# Altium PCB CAN_Breakout-Board.PcbDoc
Units mm, origin at the board's own origin, x right, y up, seen from the top; angles counter-clockwise.
Board outline 50.8 x 25.4 mm, 2 copper layers (Top Layer, Bottom Layer); 47 components, 28 nets, 171 pads, 21 vias.
Unrouted connection lines stored in the file: 31.
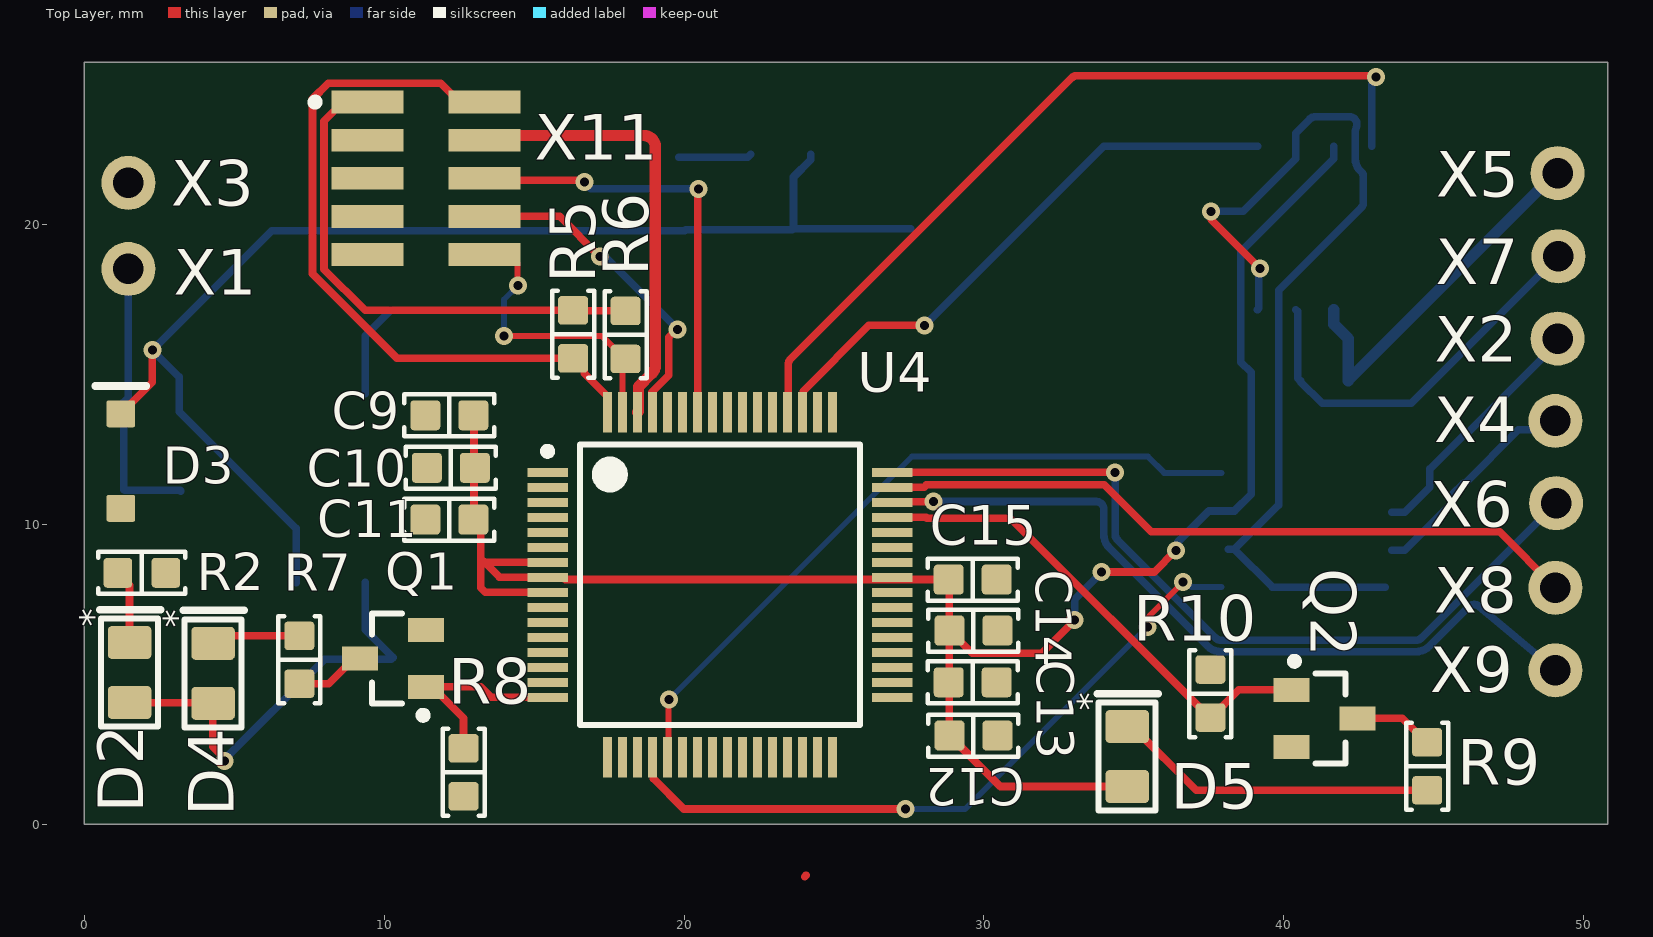
[diagram p0: Top Layer view]
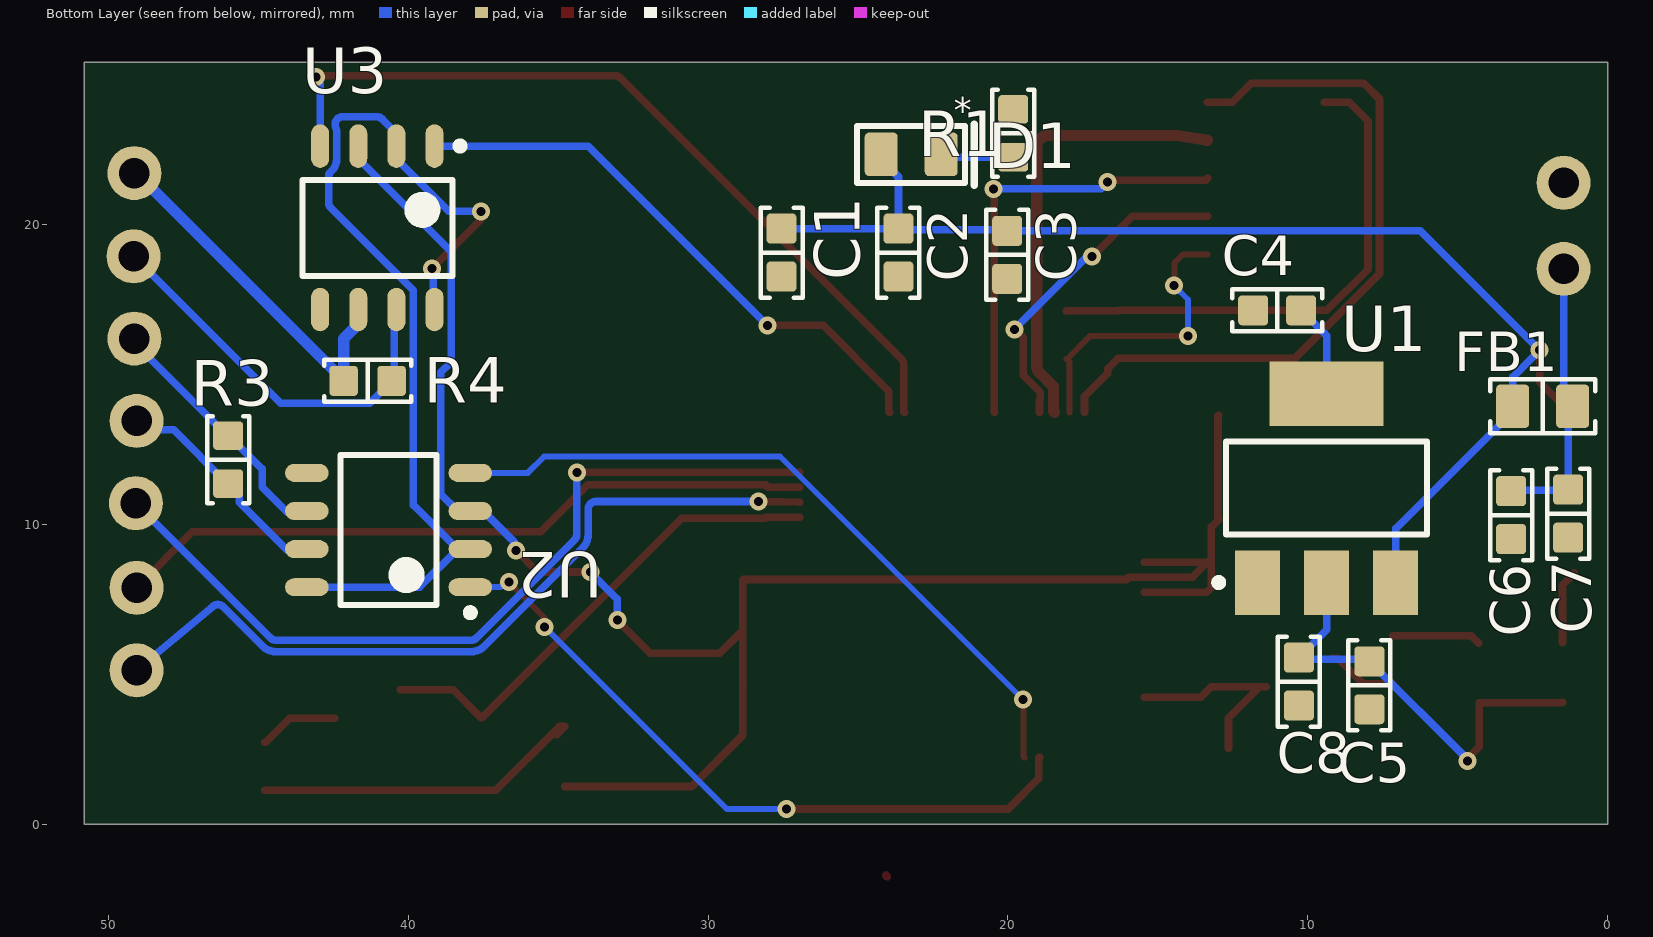
[diagram p1: Bottom Layer view, seen from below]
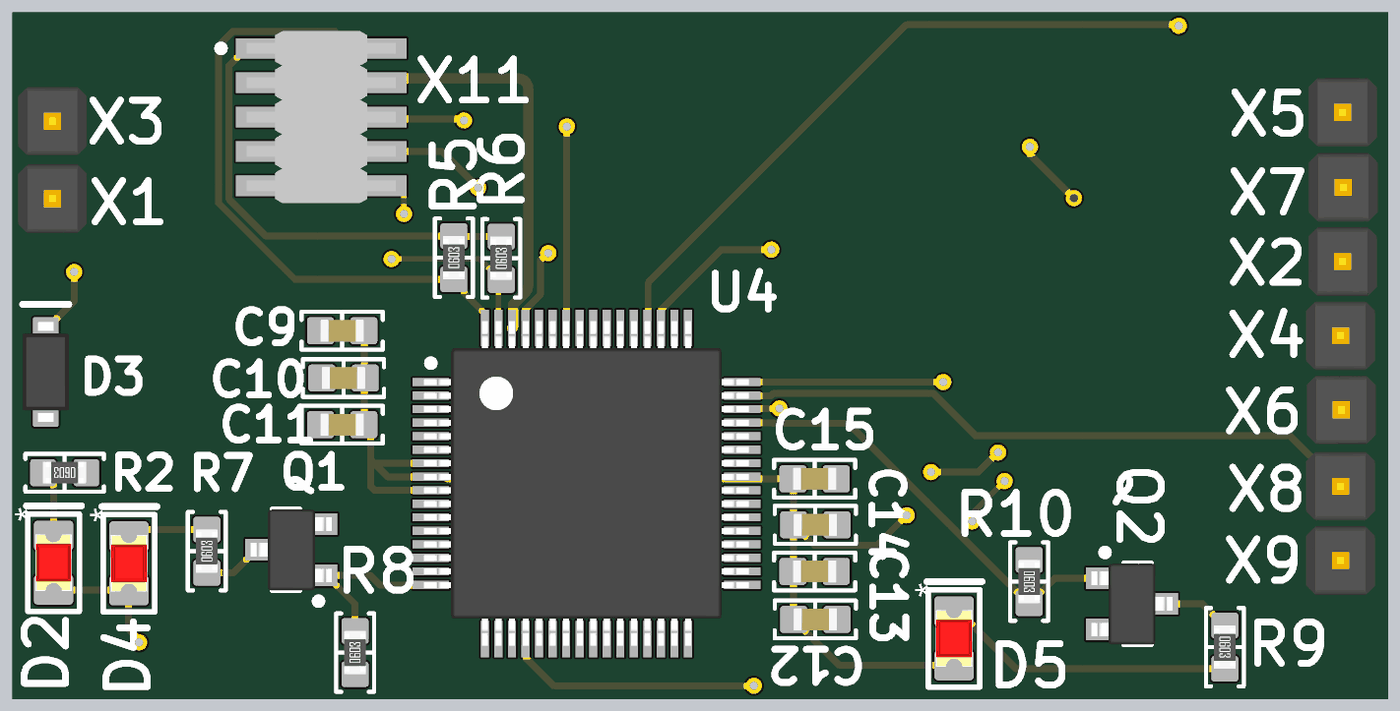
[diagram p2: 3D render of the assembled board from above, using the file's embedded part models]
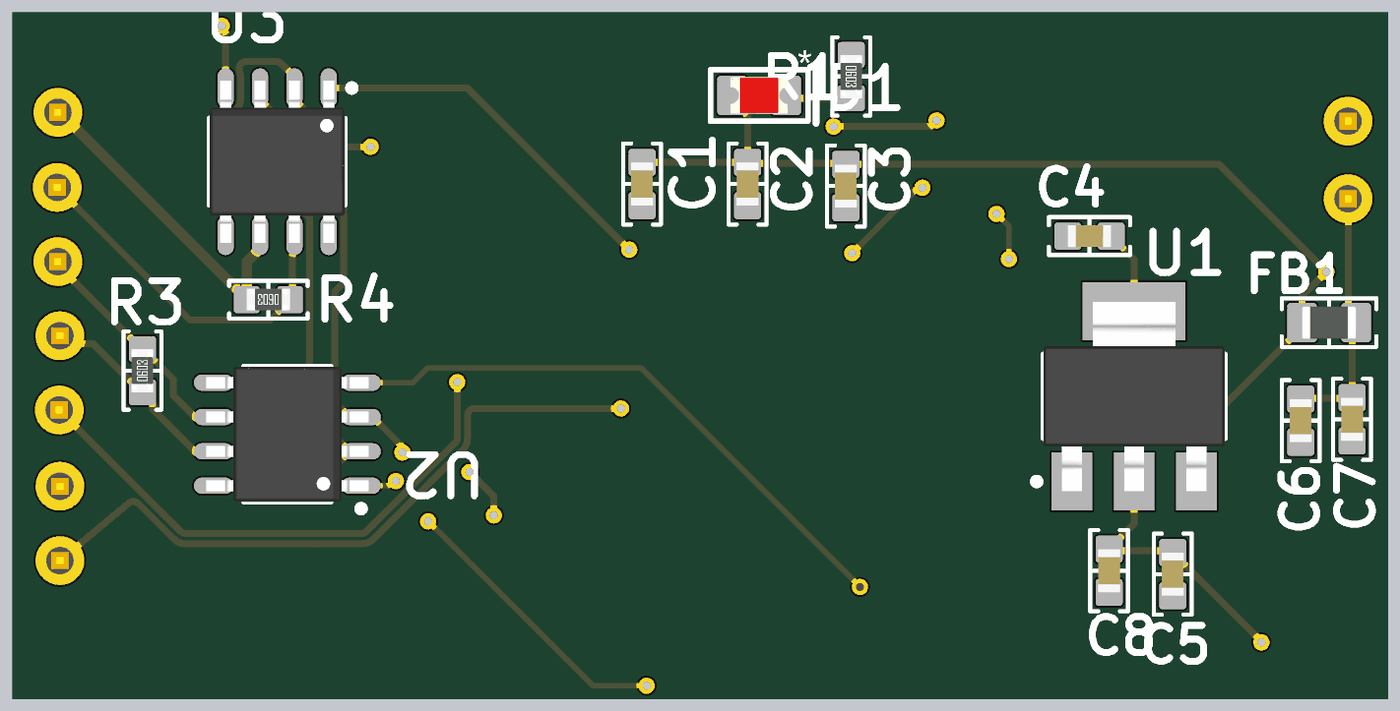
[diagram p3: 3D render of the assembled board from below, using the file's embedded part models]

## Layer stack, top to bottom
Top Solder: solder mask 0.0102, Solder Resist, Dk 3.5
Top Layer: signal copper 0.0356
Dielectric 1: dielectric 0.32, FR-4, Dk 4.8
Bottom Layer: signal copper 0.0356
Bottom Solder: solder mask 0.0102, Solder Resist, Dk 3.5

## Board outline
0,0 50.8,0 50.8,25.4 0,25.4

## Design rules (kind name [scope] priority, off if disabled: settings)
BoardOutlineClearance [All] p1: gap=0.2 ignorepadtopadclearanceinfootprint=FALSE
Clearance [All] p1: gap=0.127 ignorepadtopadclearanceinfootprint=FALSE except(0.25: Arc-Hole Track-Hole SMDPad-Hole THPad-Hole Via-Hole Fill-Hole Poly-Hole Region-Hole Text-Hole)
ComponentClearance [All] p1: gap=0.127 collisioncheckmode=3 verticalgap=0.127 showdistances=TRUE
DiffPairsRouting [All] p1: maxlimit=0.254 minlimit=0.127 mostfreqgap=0.127 toplayer_minwidth=0.127 toplayer_maxwidth=25.4 toplayer_prefwidth=0.127 bottomlayer_minwidth=0.127 bottomlayer_maxwidth=25.4 bottomlayer_prefwidth=0.127 maxuncoupledlength=12.7
Height [All] p1: minheight=0 maxheight=1816.048 prefheight=12.7
HoleSize [All] p1: absolutevalues=TRUE maxlimit=6.3 minlimit=0.3 maxpercent=80.000 minpercent=20.000
HoleToHoleClearance [All] p1: gap=0.25 allowstackedmicrovias=FALSE
MinimumAnnularRing [All] p1: minimumring=0.076
MinimumSolderMaskSliver [All] p1: minsoldermaskwidth=0
PlaneClearance [All] p1: clearance=0.127
PlaneConnect PlaneConnectPowerPads [InPadClass('PowerPads')] p1: planeconnectstyle=Direct reliefexpansion=0.508 reliefentries=4 reliefconductorwidth=0.254 reliefairgap=0.254
PlaneConnect [All] p2: pad.planeconnectstyle=Relief pad.reliefexpansion=0.3 pad.reliefentries=4 pad.reliefconductorwidth=0.127 pad.reliefairgap=0.127 via.planeconnectstyle=Direct via.reliefexpansion=0.3 via.reliefentries=4 via.reliefconductorwidth=0.127 via.reliefairgap=0.127
PolygonConnect PolygonConnectPowerPads [All vs (InPadClass('PowerPads'))] p1: connectstyle=Direct reliefconductorwidth=0.254 reliefentries=4 polygonreliefangle="90 Angle" airgapwidth=0.254
PolygonConnect [All] p2: thpad.connectstyle=Relief thpad.reliefconductorwidth=0.127 thpad.reliefentries=4 thpad.polygonreliefangle="90 Angle" thpad.airgapwidth=0.127 smdpad.connectstyle=Relief smdpad.reliefconductorwidth=0.127 smdpad.reliefentries=4 smdpad.polygonreliefangle="90 Angle" smdpad.airgapwidth=0.127 via.connectstyle=Direct via.reliefconductorwidth=0.127 via.reliefentries=4 via.polygonreliefangle="90 Angle" via.airgapwidth=0.127
RoutingVias [All] p1: holewidth=0.3 width=0.6 viastyle="Through Hole" minholewidth=0.3 minwidth=0.6 maxholewidth=0.6 maxwidth=6.6
SilkToSilkClearance [All] p1: silktosilkclearance=0
SilkToSolderMaskClearance [IsPad] p1: minsilkscreentomaskgap=0.127 clearancetoexposedcopper=TRUE
SolderMaskExpansion [All] p1: expansion=0.075 istentingtop=FALSE
Width [All] p1: maxlimit=25.4 minlimit=0.127 preferedwidth=0.127 minimp=50.000000 maximp=50.000000 favimp=50.000000
20 further rules are at their usual default settings.

## Classes and differential pairs
channel class can: U_can_0 U_can_1
component class U_uc: C10 C11 C12 C13 C14 C15 D4 D5 Q1 Q2 R5 R6 R7 R8 R9 R10 U4 X11
component class U_can_1: C9 R4 U3
component class U_can_0: C8 R3 U2
component class U_5V_Regulator: C1 C2 C3 C4 C5 C6 C7 D1 D2 D3 FB1 R1 R2 U1
component class Top_Level: X1 X2 X3 X4 X5 X6 X7 X8 X9
differential pair 1_CAN: +1_CAN_P -1_CAN_N
differential pair 0_CAN: +0_CAN_P -0_CAN_N

## Components (designator, comment, footprint, x,y, rotation, side; value= is the part's Value field where it differs from the comment)
C1 "Capacitor" 0603_CAP 27.55,19.05 r90 bottom value=1u
C2 "Capacitor" 0603_CAP 23.65,19.05 r90 bottom value=1u
C3 "Capacitor" 0603_CAP 20.025,18.975 r90 bottom value=10uF
C4 "Capacitor" 0603_CAP 11.025,17.125 r180 bottom value=10uF
C5 "Capacitor" 0603_CAP 7.95,4.625 r90 bottom value=1u
C6 "Capacitor" 0603_CAP 3.225,10.3 r90 bottom value=0.1u
C7 "Capacitor" 0603_CAP 1.325,10.35 r90 bottom value=0.1u
C8 "Capacitor" 0603_CAP 10.3,4.75 r270 bottom value=0.1u (schematic designator C14)
C9 "Capacitor" 0603_CAP 12.175,13.625 r180 top value=0.1u (schematic designator C14)
C10 "Capacitor" 0603_CAP 12.225,11.875 r0 top value=0.1u (schematic designator C8)
C11 "Capacitor" 0603_CAP 12.175,10.15 r0 top value=1u (schematic designator C9)
C12 "Capacitor" 0603_CAP 29.65,2.95 r180 top value=10n (schematic designator C10)
C13 "Capacitor" 0603_CAP 29.625,4.725 r180 top value=1u (schematic designator C11)
C14 "Capacitor" 0603_CAP 29.65,6.45 r180 top value=1u (schematic designator C12)
C15 "Capacitor" 0603_CAP 29.625,8.15 r180 top value=1u (schematic designator C13)
D1 "0805_LED" 0805_LED 23.225,22.325 r180 bottom (schematic designator D13)
D2 "0805_LED" 0805_LED 1.515,5.05 r90 top (schematic designator D14)
D3 "DDZ9701" SOD-123 1.225,12.1 r270 top (schematic designator D15)
D4 "0805_LED" 0805_LED 4.3,5.024 r90 top (schematic designator D16)
D5 "0805_LED" 0805_LED 34.775,2.25 r90 top (schematic designator D1)
FB1 "*" 0805_Ferrite 2.175,13.925 r0 bottom
Q1 "DMG2302UK-7" SOT23-3 10.3,5.525 r180 top
Q2 "DMG2302UK-7" SOT23-3 41.35,3.525 r0 top
R1 "Resistor" 0603_RES 19.825,23.025 r270 bottom value=2.2k (schematic designator R14)
R2 "Resistor" 0603_RES 1.925,8.375 r180 top value=470 (schematic designator R15)
R3 "Resistor" 0603_RES 46,12.15 r90 bottom value=120 (schematic designator R20)
R4 "Resistor" 0603_RES 41.35,14.775 r0 bottom value=120 (schematic designator R20)
R5 "Resistor" 0603_RES 16.3,16.325 r90 top value=10k (schematic designator R16)
R6 "Resistor" 0603_RES 18.05,16.302 r90 top value=10k (schematic designator R17)
R7 "Resistor" 0603_RES 7.175,5.475 r90 top value=470 (schematic designator R18)
R8 "Resistor" 0603_RES 12.65,1.723 r90 top value=100 (schematic designator R19)
R9 "Resistor" 0603_RES 44.775,1.925 r270 top value=470 (schematic designator R1)
R10 "Resistor" 0603_RES 37.55,4.35 r270 top value=100 (schematic designator R2)
U1 "NCP1117ST50T3G" SOT-233-4 9.375,11.2 r90 bottom
U2 "MCP2561/2FD" SOIC-8 40.65,9.8 r0 bottom (schematic designator U3)
U3 "MCP2561/2FD" SOIC-8 41.025,19.875 r270 bottom
U4 "MKE18F512VLH16" TQFP64 21.2,7.975 r0 top (schematic designator U2)
X1 "GenericPinHeader(0.1in)" GenericPinHeader(.1in) 1.475,18.505 r0 top
X2 "GenericPinHeader(0.1in)" GenericPinHeader(.1in) 49.125,16.182 r0 top
X3 "GenericPinHeader(0.1in)" GenericPinHeader(.1in) 1.475,21.375 r0 top
X4 "GenericPinHeader(0.1in)" GenericPinHeader(.1in) 49.05,13.438 r0 top
X5 "GenericPinHeader(0.1in)" GenericPinHeader(.1in) 49.125,21.7 r0 top
X6 "GenericPinHeader(0.1in)" GenericPinHeader(.1in) 49.075,10.695 r0 top
X7 "GenericPinHeader(0.1in)" GenericPinHeader(.1in) 49.15,18.925 r0 top
X8 "GenericPinHeader(0.1in)" GenericPinHeader(.1in) 49.05,7.875 r0 top
X9 "GenericPinHeader(0.1in)" GenericPinHeader(.1in) 49.05,5.125 r0 top
X11 "20021121-00010C4LF" HDR2X5_SMT 11.4,21.525 r270 top (schematic designator X15)

## Footprints (in the part's own frame and the unit in brackets; to place one, negate y for a bottom-side part, rotate by r counter-clockwise, add the part's x,y. Pads: shape width x height; smd on the part's side, far side on the other; paste and mask are expansions set on the pad)
0603_CAP [mm]
  rrect25% 1x1 smd: 1(-0.8,0) 2(0.8,0)
  silkscreen extent -1.5,-0.7 1.5,0.7, body extent -0.8,-0.41 0.8,0.41, height 0.82
0603_RES [mm] "Chip Resistor, 2-Leads, Body 1.60x0.80mm, IPC Medium Density"
  rrect25% 0.95x1 smd: 1(-0.8,0) 2(0.8,0)
  silkscreen extent -1.45,-0.7 1.45,0.7, body extent -0.8,-0.4 0.8,0.4, height 0.45
0805_Ferrite [mm]
  rrect25% 1.1x1.45 smd: 1(-1,0) 2(1,0)
  silkscreen extent -1.75,-0.9 1.75,0.9, body extent -1,-0.6 1,0.6, height 0.9
0805_LED [mm]
  rrect25% 1.1x1.45 smd: 1(-1,0) 2(1,0)
  silkscreen extent -1.8,-1.03 2.1,1, body extent -1.05,-0.67 1.05,0.67, height 0.9
GenericPinHeader(.1in) [mm] "Generic .1in (2.54mm) pin header"
  round 1.8 hole 1.016: 1(0,0)
  body extent -1.27,-1.27 1.27,1.27, height 9.5
HDR2X5_SMT [mm] "Header, 10-Leads, Body 3.43x6.35mm, Pitch 1.27mm"
  rect 0.76x2.4 smd: 1(-2.54,-1.95) 2(-2.54,1.95) 3(-1.27,-1.95) 4(-1.27,1.95) 5(0,-1.95) 6(0,1.95) 7(1.27,-1.95) 8(1.27,1.95) 9(2.54,-1.95) 10(2.54,1.95)
  silkscreen extent -2.66,-3.82 -2.42,-3.57, body extent -3.17,-2.75 3.18,2.75, height 4.5
SOD-123 [mm] "SODFL, 2-Leads, Body 1.55x3.70mm, IPC Medium Density"
  rrect15% 0.9x0.95 smd: 1(-1.575,0) 2(1.575,0)
  silkscreen extent -2.5,-0.85 -2.5,0.85, body extent -1.85,-0.85 1.85,0.85, height 1.35
SOIC-8 [mm] "SOIC, 8-Leads, Body 4.90x3.90mm, Pitch 1.27mm, IPC Medium Density"
  oval 1.45x0.6 smd: 1(-2.725,1.905) 2(-2.725,0.635) 3(-2.725,-0.635) 4(-2.725,-1.905) 5(2.725,-1.905) 6(2.725,-0.635) 7(2.725,0.635) 8(2.725,1.905)
  silkscreen extent -2.85,-2.5 1.6,2.88, body extent -3,-2.5 3,2.5, height 1.75
SOT23-3 [mm] "SOT23, 3-Leads, Body 2.92x2.37mm, Pitch 0.95mm, IPC Medium Density, NUP2105L"
  rect 1.2x0.8 smd: 1(-1.1,0.95) 2(-1.1,-0.95) 3(1.1,0)
  silkscreen extent -1.13,-1.5 0.7,2.02, body extent -1.5,-1.5 1.5,1.5, height 1.25
SOT-233-4 [mm] "SOT223, 4-Leads, Body 6.50x7.00mm (avg), Pitch 2.30mm, IPC Medium Density"
  rect 2.15x1.5 smd: 1(-3.15,2.3) 2(-3.15,0) 3(-3.15,-2.3)
  rect 2.15x3.8 smd: 4(3.15,0)
  silkscreen extent -3.27,-3.35 1.55,3.73, body extent -3.5,-3.35 3.5,3.35, height 1.8
TQFP64 [mm] "TSQFP, 64-Leads, Body 10.00x10.00mm, Pitch 0.50mm, IPC Medium Density, MKE18F512VLH16"
  rect 1.35x0.3 smd: 1(-5.75,3.75) 2(-5.75,3.25) 3(-5.75,2.75) 4(-5.75,2.25) 5(-5.75,1.75) 6(-5.75,1.25) 7(-5.75,0.75) 8(-5.75,0.25) 9(-5.75,-0.25) 10(-5.75,-0.75) 11(-5.75,-1.25) 12(-5.75,-1.75) 13(-5.75,-2.25) 14(-5.75,-2.75) 15(-5.75,-3.25) 16(-5.75,-3.75) 33(5.75,-3.75) 34(5.75,-3.25) 35(5.75,-2.75) 36(5.75,-2.25) 37(5.75,-1.75) 38(5.75,-1.25) 39(5.75,-0.75) 40(5.75,-0.25) 41(5.75,0.25) 42(5.75,0.75) 43(5.75,1.25) 44(5.75,1.75) 45(5.75,2.25) 46(5.75,2.75) 47(5.75,3.25) 48(5.75,3.75)
  rect 0.3x1.35 smd: 17(-3.75,-5.75) 18(-3.25,-5.75) 19(-2.75,-5.75) 20(-2.25,-5.75) 21(-1.75,-5.75) 22(-1.25,-5.75) 23(-0.75,-5.75) 24(-0.25,-5.75) 25(0.25,-5.75) 26(0.75,-5.75) 27(1.25,-5.75) 28(1.75,-5.75) 29(2.25,-5.75) 30(2.75,-5.75) 31(3.25,-5.75) 32(3.75,-5.75) 49(3.75,5.75) 50(3.25,5.75) 51(2.75,5.75) 52(2.25,5.75) 53(1.75,5.75) 54(1.25,5.75) 55(0.75,5.75) 56(0.25,5.75) 57(-0.25,5.75) 58(-0.75,5.75) 59(-1.25,5.75) 60(-1.75,5.75) 61(-2.25,5.75) 62(-2.75,5.75) 63(-3.25,5.75) 64(-3.75,5.75)
  silkscreen extent -5.87,-4.67 4.67,4.68, body extent -6,-6 6,6, height 1.6

## Part data
C1 C2 C5 C6 C7: Voltage=16V
D1 D2 D4 D5: "Generic 0805 LED"
D3: "Zener Diode 14V 500mW ±5% Surface Mount SOD-1", Package=SOD-123, ComponentLink1Description=Digikey, ComponentLink1URL=https://www.digikey.com/product-detail/en/diodes-incorporated/DDZ9701-7/DDZ9701-7DICT-ND/3877402, Num_Circuits=1, Vr=10.6
FB1: library part ChipFerrite, =Z@100MHz=200OHM, iMax=3A
Q1 Q2: "MOSFET N-CH 20V 2.8A SOT23", Continuous Drain Current=2.8A, Drain To Source Breakdown Voltage=20V, Drain To Source Resistance=61mΩ, Gate To Source Voltage=12V, Input Capacitace At Vds="130pF @ 10V", Manufacturer="Diodes Inc.", Max Forward Diode Voltage=1.2V, Max Junction Temp=+150°C, Package=SOT23, Power Dissipation=0.66W, Pulse Drain Current=12A, Temperature="-55°C to +150°C", Temperature Range Low=-55°C, Typ Forward Diode Voltage=0.7V, Automotive=Yes, Automotive Grade="Grade 0", Category=Trans, ComponentLink2Description=Datasheet, ComponentLink2URL=https://www.diodes.com/assets/Datasheets/DMG2302UK.pdf, Depletion Mode=False, Device Class L1="Discrete Semiconductors", Device Class L2=Transistors, Device Class L3=MOSFETs, Digikey Description="MOSFET N-CH 20V 2.8A SOT23", Drain To Source Voltage=20V, Footprint Url=https://www.diodes.com/assets/Package-Files/SOT23.pdf, Gate Charge At Vgs="2.8nC @ 10V", Height=1.1mm, Lead Free=Yes, Manufacturer Part Number=DMG2302UK-7, Number Of Channels=1, Number Of N Channels=1, Octopart=https://octopart.com/dmg2302uk-7-diodes+inc.-73850182, Reverse Recovery Charge=0.5nC, Reverse Recovery Time=5.3ns, RoHS=TRUE, Rthja Max=192°C/W, Standoff Height=0.013mm, Temperature Range High=+150°C, Threshold Vgs Max=1V, Threshold Vgs Min=0.3V, Turn Off Delay Time=4.2ns, Turn On Delay Time=0.6ns
U2 U3: "1/1 Transceiver CANbus", ComponentLink1Description=Digikey, ComponentLink1URL=https://www.digikey.com/product-detail/en/microchip-technology/MCP2561FDT-E-SN/MCP2561FDT-E-SNCT-ND/8637243, ComponentLink2Description=Datasheet, ComponentLink2URL=http://ww1.microchip.com/downloads/en/DeviceDoc/20005284A.pdf, Name=MCP2561/2FD, Type=CAN, vcc=5
U4: Package=TQFP64, vcc=2.7-5.5
X1 X2 X3 X4 X5 X6 X7 X8 X9: "Generic .1in(2.54mm) pitch pin header"
X11: "Header, 10-Leads, Body 3.43x6.35mm, Pitch 1.27mm", Circuits=10, ComponentLink1Description=Digikey, ComponentLink1URL=https://www.digikey.com/product-detail/en/amphenol-icc-fci/20021121-00010C4LF/609-3695-1-ND/2209147, Name=20021121-00010C4LF
U1: ComponentLink1Description=Digikey, ComponentLink1URL=https://www.digikey.com/product-detail/en/on-semiconductor/NCP1117ST50T3G/NCP1117ST50T3GOSCT-ND/1967217, ComponentLink2Description=Datasheet, ComponentLink2URL=https://www.onsemi.com/pub/Collateral/NCP1117-D.PDF, Name=NCP1117ST50T3G, Type="Linear fixed", Vout=5

## Via types
v1: diameter 0.6, hole 0.3, Top Layer to Bottom Layer, 21 vias

## Nets (pads, with @x,y where several pads share a name; then routed paths per layer and width w, separated by ;. In a path a pad name is that pad's centre, name@x,y a point inside that pad or via, vN(x,y) a via of type N, cw(c..) or ccw(c..) an arc to the next point about the centre after c; other vN are vias at no path point)
0_CAN_N: R3.2 U2.6 X2.1 | length 8.4
  Bottom Layer w0.254: U2.6@43.6,10.39 44.025,10.39 44.859,11.224 44.859,11.834 45.975,12.95 R3.2 46.025,12.95 49.125,16.05 X2.1
0_CAN_P: R3.1 U2.7 X4.1 | length 7.4
  Bottom Layer w0.254: U2.7@43.6,9.12 44.025,9.12 45.627,10.722 45.627,11.002 45.975,11.35 R3.1 46.025,11.35 47.817,13.142 48.754,13.142 X4.1
1_CAN_N: R4.2 U3.6 X5.1 | length 12.4
  Bottom Layer w0.381: U3.6 41.66,16.666 42.15,16.176 R4.2@42.15,14.8 ; R4.2 R4.2@42.15,14.8 ; X5.1 49.05,21.7 R4.2@42.15,14.8
1_CAN_P: R4.1 U3.7 X7.1 | length 13.4
  Bottom Layer w0.254: U3.7 40.456,17.084 40.456,14.869 R4.1 40.55,14.75 41.279,14.021 44.246,14.021 X7.1
5V: C4.2 C5.2 C8.1 C9.1 C10.2 C11.2 C12.2 C13.2 C14.2 C15.2 D2.1 D4.1 D5.1 R5.2 R6.2 U1.2 U1.4 U2.3 U3.3 U4.7 U4.8 U4.9 U4.41 X11.1 | length 99.4
  Top Layer w0.254: D2.1 1.529,4.037 4.287,4.037 4.287,2.582 4.675,2.194 v1(4.675,2.1) ; X11.1 8.63,24.065 7.996,23.431 7.996,18.5 9.371,17.125 R5.2 16.311,17.114 18.039,17.114 R6.2 ; C9.1 13,13.6 13,11.9 C10.2 13,11.85 13,10.175 C11.2 13.225,9.9 13.225,8.85 ; U4.9 13.374,7.725 13.225,7.874 13.225,8.85 ; U4.7 13.35,8.725 ; C14.2@28.837,6.438 28.837,4.737 C13.2 28.837,4.713 28.837,2.962 C12.2 30.55,1.25 D5.1 ; v1(33.025,6.8) 31.921,5.696 29.604,5.696 C14.2 28.837,6.463 28.837,8.137 C15.2 16.05,8.15 15.975,8.225 U4.8 13.85,8.225 13.35,8.725 ; v1(33.925,8.4) 35.675,8.4 v1(36.4,9.125) ; 13.225,8.85 13.35,8.725
  Bottom Layer w0.254: v1(4.675,2.1) 4.675,2.15 C5.2 8.013,5.488 10.238,5.488 C8.1 9.375,6.475 U1.2 ; U1.4 9.375,16.275 C4.2 ; v1(33.025,6.8) 33.025,7.5 v1(33.925,8.4) ; v1(36.4,9.125) 36.466,9.191 36.466,9.401 37.5,10.435 U2.3 38.35,10.435 38.904,10.989 38.904,15.062 38.566,15.4 38.566,19.081 41.66,22.175 U3.3
12V: C6.2 C7.2 FB1.1 X1.1 | length 9.5
  Bottom Layer w0.254: X1.1 1.468,18.497 1.468,14.218 FB1.1 1.325,13.775 C7.2 1.35,11.125 3.2,11.125 C6.2
GND: C1.1 C2.1 C3.1 C4.1 C5.1 C6.1 C7.1 C8.2 C9.2 C10.1 C11.1 C12.1 C13.1 C14.1 C15.1 D3.2 Q1.2 Q2.2 R1.1 R2.1 R8.1 R10.1 U1.1 U2.2 U2.8 U3.2 U3.8 U4.10 U4.40 X3.1 X11.3 X11.5 | length 32.6
  Top Layer w0.254: v1(37.575,20.425) 37.575,20.15 v1(39.2,18.525)
  Bottom Layer w0.254: v1(37.575,20.425) 38.64,20.425 40.39,22.175 U3.2 40.39,23.025 40.87,23.505 cw(c41.049,23.325) 41.049,23.579 42.18,23.579 cw(c42.18,23.325) 42.416,23.231 ccw(c42.93,23.025) 42.376,23.025 42.376,22.175 ccw(c42.93,22.175) 42.565,21.759 cw(c42.396,21.569) 42.65,21.57 42.65,20.724 cw(c42.396,20.724) 42.576,20.544 39.821,17.789 39.821,10.636 U2.2@38.35,9.165 ; U2.2@38.138,9.165 U2.2@38.35,9.165 ; U3.8 39.16,17.19 39.16,18.485 v1(39.2,18.525) ; U2.8 39.62,7.895 U2.2@38.35,9.165
Heart_Beat: Q1.1 R8.2 U4.16 | length 6.7
  Top Layer w0.254: Q1.1 Q1.1@11.6,4.575 ; R8.2 12.65,3.525 Q1.1@11.6,4.575 ; U4.16 13.574,4.225 13.224,4.575 Q1.1@11.6,4.575
IMD_OK: Q2.1 R10.2 U4.45 | length 16.4
  Top Layer w0.254: U4.45 28.067,10.225 28.096,10.196 30.879,10.196 37.525,3.55 R10.2 37.575,3.55 38.5,4.475 Q2.1
JTAG_RST: R6.1 U4.63 X11.10 | length 10
  Top Layer w0.2: X11.10 14.17,18.985 14.45,18.705 14.45,17.954 v1(14.459,17.945) ; v1(14,16.275) 17.252,16.275 18.025,15.502 R6.1 17.95,15.402 U4.63
  Bottom Layer w0.2: v1(14,16.275) 14,17.486 v1(14.459,17.945)
JTAG_TCLK: U4.62 X11.4 | length 15
  Top Layer w0.381: X11.4 14.36,22.953 18.667,22.953 cw(c18.666,22.572) 19.047,22.572 19.047,15.303 cw(c18.666,15.303) 18.936,15.033 18.483,14.58 18.483,13.758 U4.62
JTAG_TDI: U4.61 X11.8 | length 11.1
  Top Layer w0.254: X11.8 15.853,20.255 v1(17.197,18.911) ; U4.61 18.95,14.1 18.927,14.123 18.927,14.396 19.492,14.961 19.492,16.225 19.76,16.493 v1(19.787,16.493)
  Bottom Layer w0.254: v1(17.197,18.911) 17.369,18.911 v1(19.787,16.493)
JTAG_TDO: U4.58 X11.6 | length 14.7
  Top Layer w0.254: X11.6 13.413,21.462 16.613,21.462 v1(16.675,21.4) ; U4.58 20.463,13.738 20.463,21.163 v1(20.475,21.175)
  Bottom Layer w0.254: v1(16.675,21.4) 16.9,21.175 v1(20.475,21.175)
JTAG_TMS: R5.1 U4.64 X11.2 | length 24.2
  Top Layer w0.254: X11.2 12.53,24.065 11.896,24.699 8.145,24.699 7.615,24.169 7.615,18.342 10.432,15.525 R5.1 16.325,15.525 16.673,15.177 16.673,15.027 17.45,14.25 U4.64
NetC1_2: C1.2 C2.2 C3.2 D1.1 D3.1 FB1.2 U1.3 | length 42
  Top Layer w0.254: D3.1 2.275,14.725 v1(2.275,15.8)
  Bottom Layer w0.254: U1.3 7.075,9.85 3.175,13.75 FB1.2 3.175,14.9 v1(2.275,15.8) 6.25,19.775 C3.2 20.062,19.813 23.613,19.813 C2.2 ; D1.1 24.225,22.144 23.65,21.569 C2.2 ; C1.2 C2.2
NetD1_2: D1.2 R1.2 | length 2.4
  Bottom Layer w0.254: R1.2 22.125,22.225 D1.2
NetD2_2: D2.2 R2.2 | length 2.5
  Top Layer w0.254: R2.2 1.125,8.35 1.515,7.96 D2.2
NetD4_2: D4.2 R7.2 | length 3
  Top Layer w0.254: D4.2 4.551,6.275 R7.2
NetD5_2: D5.2 R9.2 | length 11.3
  Top Layer w0.254: 24.025,-1.755 24.066,-1.714 ; D5.2@35.05,2.975 D5.2 34.95,3.25 37.075,1.125 R9.2
NetQ1_3: Q1.3 R7.1 | length 2.4
  Top Layer w0.254: R7.1 8.15,4.675 9,5.525 Q1.3
NetQ2_3: Q2.3 R9.1 | length 2.7
  Top Layer w0.254: Q2.3 43.95,3.525 44.75,2.725 R9.1
NetU2_1: U2.1 U4.20 | length 23.5
  Top Layer w0.2: v1(35.45,6.575) 35.45,6.875 v1(36.642,8.067)
  Top Layer w0.254: U4.20 18.973,2.202 18.973,1.518 19.991,0.5 v1(27.381,0.5)
  Bottom Layer w0.2: v1(27.381,0.5) 29.375,0.5 v1(35.45,6.575) ; v1(36.642,8.067) 36.75,8.067 36.922,7.895 U2.1
NetU2_4: U2.4 U4.21 | length 24
  Top Layer w0.2: U4.21 19.475,2.25 19.475,4.125 v1(19.5,4.15)
  Bottom Layer w0.2: v1(19.5,4.15) 27.602,12.252 35.462,12.252 36.009,11.705 U2.4
NetU3_1: U3.1 U4.51 | length 19.2
  Top Layer w0.254: U4.51 23.973,13.748 23.973,14.432 26.166,16.625 v1(28.025,16.625)
  Bottom Layer w0.254: v1(28.025,16.625) 34,22.6 U3.1
NetU3_4: U3.4 U4.52 | length 27.6
  Top Layer w0.254: U4.52 23.473,13.748 23.473,15.318 cw(c23.727,15.318) 23.547,15.497 32.926,24.876 cw(c33.105,24.696) 33.105,24.95 43.025,24.95 v1(43.075,24.9)
  Bottom Layer w0.254: U3.4 42.93,24.661 43.075,24.806 v1(43.075,24.9)
PTA2: U4.48 X6.1 | length 27.6
  Top Layer w0.254: U4.48 v1(34.375,11.725)
  Bottom Layer w0.254: v1(34.375,11.725) 34.375,9.662 cw(c34.121,9.662) 34.375,9.659 ccw(c34.629,9.655) 34.385,9.585 ; 34.385,9.584 ccw(c34.629,9.655) 34.449,9.476 37.726,6.199 ccw(c37.905,6.379) 37.905,6.125 44.4,6.125 ccw(c44.4,6.379) 44.579,6.199 X6.1
PTA3: U4.47 X8.1 | length 23.6
  Top Layer w0.254: U4.47 28.006,11.225 28.085,11.304 34.013,11.304 35.579,9.737 47.188,9.737 X8.1
PTD2: U4.46 X9.1 | length 26.3
  Top Layer w0.254: U4.46 27.498,10.748 v1(28.325,10.75)
  Bottom Layer w0.254: v1(28.325,10.75) 33.74,10.75 cw(c33.74,10.496) 33.994,10.496 33.994,9.665 cw(c33.74,9.664) 33.994,9.661 ccw(c34.629,9.655) 34.18,9.206 37.457,5.929 ccw(c37.905,6.379) 37.905,5.744 44.4,5.744 ccw(c44.4,6.379) 44.849,5.93 46.161,7.242 cw(c46.34,7.062) 46.503,7.257 X9.1 X9.1@49.106,5.078
pads on no net: U2.5 U3.5 U4.1 U4.2 U4.3 U4.4 U4.5 U4.6 U4.11 U4.12 U4.13 U4.14 U4.15 U4.17 U4.18 U4.19 U4.22 U4.23 U4.24 U4.25 U4.26 U4.27 U4.28 U4.29 U4.30 U4.31 U4.32 U4.33 U4.34 U4.35 U4.36 U4.37 U4.38 U4.39 U4.42 U4.43 U4.44 U4.49 U4.50 U4.53 U4.54 U4.55 U4.56 U4.57 U4.59 U4.60 X11.7 X11.9

## Text inside footprints (layer, text, board x,y; h text height)
D1: Bottom Overlay "*" at 21.8,23.075 h1.52
D2: Top Overlay "*" at 1.007,6.574 h1.52 r90
D4: Top Overlay "*" at 3.792,6.548 h1.52 r90
D5: Top Overlay "*" at 34.267,3.774 h1.52 r90